# Altium PCB STM32F103ZET6.PCBDOC (part 2 of 4)
Units mil, origin at the board's own origin, x right, y up, seen from the top; angles counter-clockwise.
Board outline 4000 x 2280 mil, 2 copper layers (Top Layer, Bottom Layer); 80 components, 152 nets, 495 pads, 75 vias.
Unrouted connection lines stored in the file: 4.
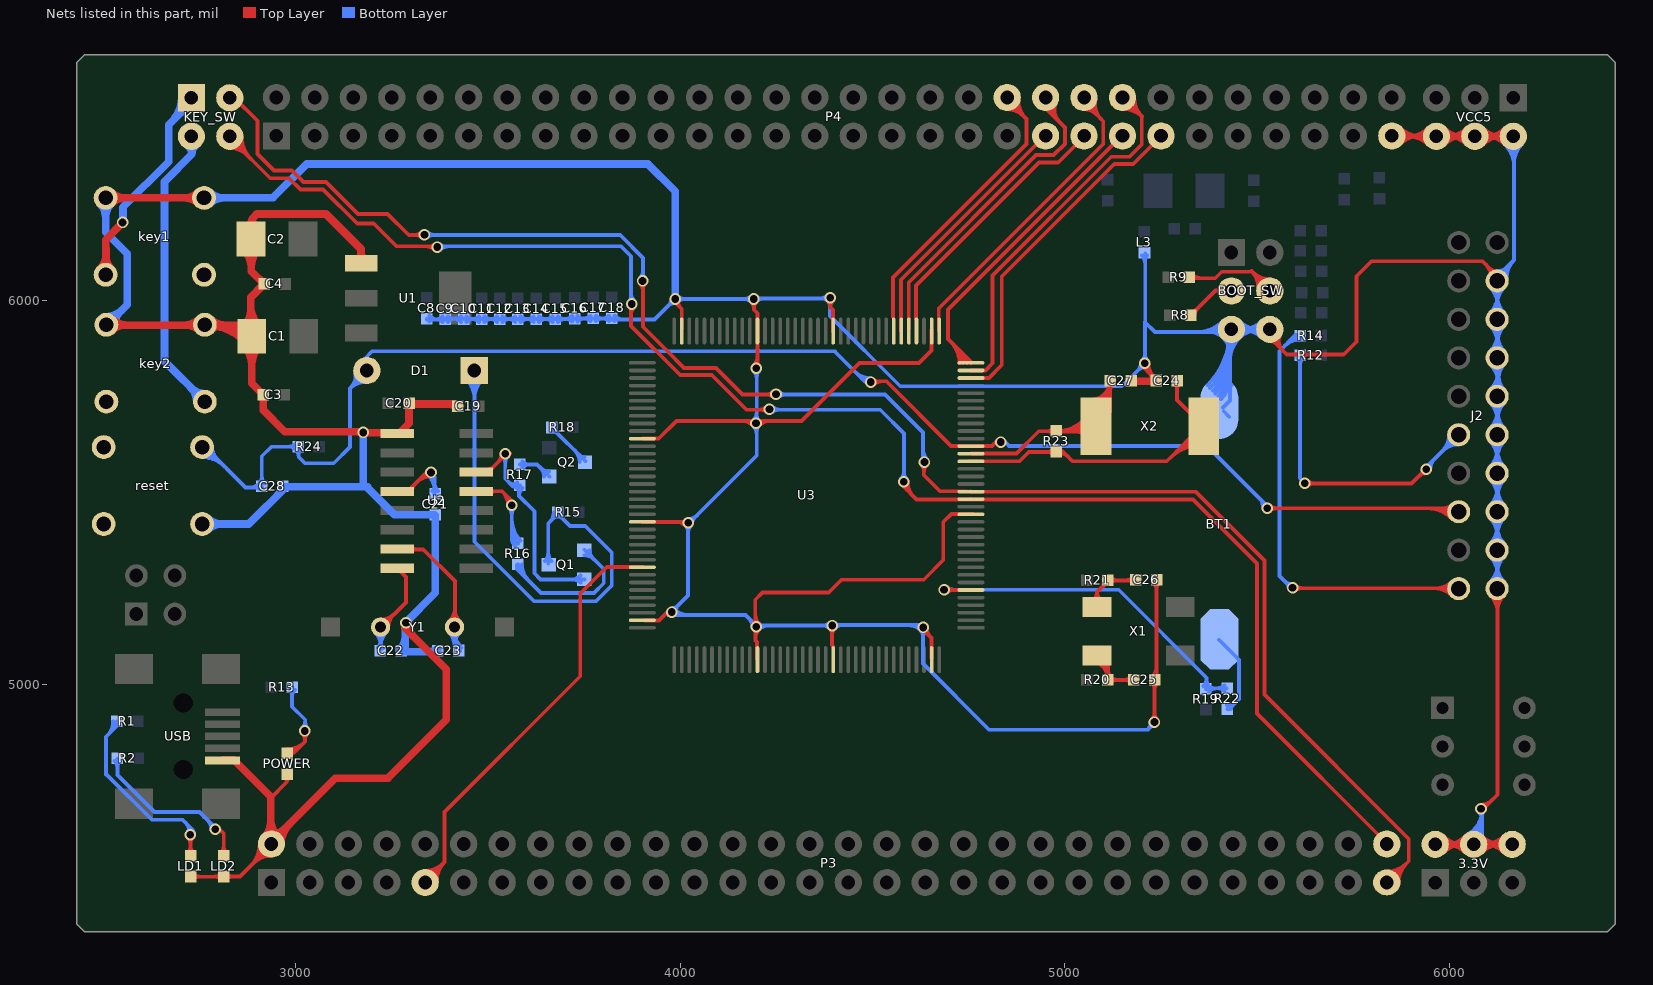
[diagram p2: the nets of this part, all layers, seen from the top]

## Via types
v1: diameter 30, hole 20, Top Layer to Bottom Layer, 68 vias
v2: diameter 125.98, hole 118.11, Top Layer to Bottom Layer, 4 vias
v3: diameter 23.62, hole 15.75, Top Layer to Bottom Layer, 2 vias
v4: diameter 30, hole 15, Top Layer to Bottom Layer, 1 vias

## Nets (pads, with @x,y where several pads share a name; then routed paths per layer and width w, separated by ;. In a path a pad name is that pad's centre, name@x,y a point inside that pad or via, vN(x,y) a via of type N, cw(c..) or ccw(c..) an arc to the next point about the centre after c; other vN are vias at no path point) (continued)
GND: 3.3V.2 3.3V.4 3.3V.6 BOOT_SW.5 BOOT_SW.6 BT1.2 C1.2 C2.2 C3.2 C4.2 C8.2 C9.2 C10.2 C11.2 C12.2 C13.2 C14.2 C15.2 C16.2 C17.2 C18.2 C19.1 C20.1 C21.1 C22.1 C23.1 C24.2 C25.1 C26.2 C27.2 C28.1 J2.4 J2.6 J2.8 J2.10 J2.12 J2.14 J2.16 J2.18 J2.20 key1.1 key2.1 L3.2 LD1.2 LD2.2 P3.2 P4.59 POWER.2 reset.2 U1.1 U2.1 U3.16 U3.38 U3.51 U3.61 U3.71 U3.83 U3.94 U3.107 U3.120 U3.130 U3.143 USB.5 VCC5.2 VCC5.4 VCC5.6 | length 29464.2
  Top Layer w10: LD1.2@2726,4501 LD2.2@2811,4501 ; LD1.2@2734.01,4494.43 cw(c2749.87,4478.56) 2749.87,4501 ; LD1.2@2734.01,4508.57 ccw(c2752.29,4526.85) 2752.29,4501 ; 2787.59,4501 ccw(c2787.59,4526.85) LD2.2@2805.86,4508.57 ; 2790,4501 cw(c2790,4478.56) LD2.2@2805.86,4494.43 ; LD2.2@2810,4496 LD2.2@2813,4499 ; LD2.2@2812.94,4501.5 2855.5,4501.5 P3.2@2940,4586 ; LD2.2@2820.01,4494.43 cw(c2837.08,4477.36) 2837.08,4501.5 cw(c2837.08,4525.64) LD2.2@2820.01,4508.57 ; 2882.93,4528.93 ccw(c2825.85,4586) P3.2@2906.57,4586 ; 2890.17,4536.17 cw(c2937,4489.34) P3.2@2937,4555.57 ; 2900,4546 ccw(c2859.99,4586) P3.2@2916.57,4586 ; 2907.24,4553.24 cw(c2937,4523.48) P3.2@2937,4565.57 ; 2932,4702 2977,4747 ; POWER.2@2971.2,4760.11 cw(c2959.24,4746.98) 2977,4746.98 ; POWER.2@2977,4766 2977,4747 ; POWER.2@2983.51,4759.2 ccw(c2991.72,4746.98) 2977,4746.98 ; U3.94@3900,5423 4022,5423 v1@4023,5422 ; U3.83@3901.56,5640.07 3944.07,5640.07 3990,5686 4314.88,5686 4465.62,5836.75 4620.75,5836.75 4653,5869 U3.38@4653,5923 ; U3.107@3908,5167 3945,5167 3966,5188 v1@3977,5188 ; v1@3989,6003 3989,5992 4004,5977 U3.71@4004,5923 ; 3992.03,5423 cw(c3992.03,5392.03) v1@4013.93,5413.93 ; v1@3996.17,5999.02 ccw(c4010.7,5992.7) 3999.5,5981.5 ; 4001.69,5423 ccw(c4001.69,5440.31) v1@4013.93,5428.07 ; 4158.37,5686 cw(c4158.37,5641.37) v1@4189.93,5672.93 ; 4182.51,5686 cw(c4182.51,5665.51) v1(4197,5680) cw(c4211.49,5665.51) 4211.49,5686 ; v1@4183.93,5995.93 cw(c4164.44,5976.44) 4192,5976.44 ; v1@4190.93,5143.93 cw(c4178.69,5131.69) 4196,5131.69 ; v1@4190.93,5158.07 ccw(c4181.1,5167.9) 4195,5167.9 ; v1@4190.93,5830.07 ccw(c4166.62,5854.38) 4201,5854.38 ; 4192,5981.27 cw(c4212.73,5981.27) v1@4198.07,5995.93 ; v1@4192,6003 4192,5975 4201,5966 U3.61@4201,5923 ; v1@4195,5151 4195,5221 4214,5240 4386.13,5240 4419.13,5273 4633,5273 4684,5324 4684,5423 4705,5444 U3.16@4761,5444 ; 4195,5182.38 ccw(c4229.38,5182.38) v1@4205.07,5158.07 ; 4196,5122.03 cw(c4226.97,5122.03) v1@4205.07,5143.93 ; v1@4196,5151 4196,5115 4200,5111 U3.120@4200,5067.09 ; v1@4199,5824 4201,5826 U3.61@4201,5919 ; 4201,5839.9 ccw(c4214.9,5839.9) v1@4205.07,5830.07 ; v1@4204.07,5672.93 cw(c4235.63,5641.37) 4235.63,5686 ; v1@4383.24,5998.63 cw(c4367.05,5980.98) 4391,5980.98 ; v1@4387.93,5146.93 cw(c4370.86,5129.86) 4395,5129.86 cw(c4419.14,5129.86) v1@4402.07,5146.93 ; 4391,5984.27 cw(c4411.73,5984.27) v1@4397.07,5998.93 ; v1@4391,6006 4391,5981 ; v1@4395,5155 4395,5103.29 4398,5100.29 ; U3.51@4397,5918 4397,5975 4391,5981 ; v1@4634,5150 4634,5141 4653,5122 U3.143@4653,5070 ; v1@4641.94,5147.91 ccw(c4669.86,5144.86) 4650,5125 ; v1@5207,5836 5207,5823 C24.2@5240,5790 ; v1(5208,5836) ccw(c5238.52,5834.68) 5216.92,5813.08 ; v1@5217.99,5835.57 ccw(c5269.35,5833.35) C24.2@5233,5797 ; 5219.41,5810.59 cw(c5199.89,5791.06) C24.2@5227.5,5791.06 ; 5222.88,5807.12 ccw(c5237.5,5821.74) C24.2@5237.5,5801.06 ; v1@5225.93,4910.07 ccw(c5208.86,4927.14) 5233,4927.14 ccw(c5257.14,4927.14) v1@5240.07,4910.07 ; C25.1@5226.93,5005.93 cw(c5212.27,4991.27) 5233,4991.27 ; C25.1@5226.93,5020.07 ccw(c5198.99,5048.01) 5238.5,5048.01 ; C26.2@5231.43,5265.86 cw(c5214.36,5248.79) 5238.5,5248.79 cw(c5262.64,5248.79) C26.2@5245.57,5265.86 ; v1@5233,4901 C25.1@5233,5012 ; 5233,4986.44 cw(c5260.56,4986.44) C25.1@5241.07,5005.93 ; C25.1@5236,5012 5238.5,5014.5 C26.2@5238.5,5272.94 ; BOOT_SW.6@5531,5926 5531,5905 5577,5859 5725,5859 5758,5892 5758,6062 5797,6101 6086,6101 6125,6062 J2.4@6125,6052 ; BOOT_SW.6@5533,5893.57 cw(c5533,5870.79) 5549.1,5886.9 ; BOOT_SW.6@5542.29,5919.25 ccw(c5565.5,5907.37) 5547.07,5888.93 ; BOOT_SW.6@5551.19,5914.69 ccw(c5578.36,5900.8) 5556.78,5879.22 ; BOOT_SW.6@5560.09,5910.14 ccw(c5591.22,5894.22) 5566.5,5869.5 ; P4.59@5851,6426 6164,6426 VCC5.2@6168,6430 ; P4.59@5864.45,6412.55 cw(c5896.92,6380.08) 5896.92,6426 ; P4.59@5864.45,6441.45 ccw(c5901.74,6478.74) 5901.74,6426 ; P4.59@5871.52,6405.48 cw(c5921.06,6355.94) 5921.06,6426 ; P4.59@5871.52,6448.52 ccw(c5925.89,6502.89) 5925.89,6426 ; VCC5.6@5944.48,6404.48 ccw(c5892.53,6352.53) 5892.53,6426 ccw(c5892.53,6499.47) VCC5.6@5944.48,6447.52 ; VCC5.6@5951.55,6411.55 ccw(c5916.67,6376.67) 5916.67,6426 ccw(c5916.67,6475.33) VCC5.6@5951.55,6440.45 ; 3.3V.2@5965,4584 3.3V.4@6065,4584 ; 3.3V.2@5977.45,4570.55 cw(c6009.92,4538.08) 6009.92,4584 ; 3.3V.2@5977.45,4599.45 ccw(c6014.74,4636.74) 6014.74,4584 ; VCC5.6@5980.45,6411.55 cw(c6015.33,6376.67) 6015.33,6426 cw(c6015.33,6475.33) VCC5.6@5980.45,6440.45 ; 3.3V.2@5984.52,4563.48 cw(c6034.06,4513.94) 3.3V.4@6034.06,4584 ; 3.3V.2@5984.52,4606.52 ccw(c6038.89,4660.89) 3.3V.4@6038.89,4584 ; 3.3V.2@5987.11,4584 ccw(c5987.11,4660.89) 3.3V.4@6041.48,4606.52 ; VCC5.6@5987.52,6404.48 cw(c6039.47,6352.53) 6039.47,6426 cw(c6039.47,6499.47) VCC5.6@5987.52,6447.52 ; 3.3V.2@5991.94,4584 cw(c5991.94,4513.94) 3.3V.4@6041.48,4563.48 ; 6011.26,4584 ccw(c6011.26,4636.74) 3.3V.4@6048.55,4599.45 ; 6016.08,4584 cw(c6016.08,4538.08) 3.3V.4@6048.55,4570.55 ; VCC5.4@6044.48,6404.48 ccw(c5992.53,6352.53) 5992.53,6426 ccw(c5992.53,6499.47) VCC5.4@6044.48,6447.52 ; VCC5.4@6051.55,6411.55 ccw(c6016.67,6376.67) 6016.67,6426 ccw(c6016.67,6475.33) VCC5.4@6051.55,6440.45 ; 3.3V.4@6062,4586 3.3V.6@6164,4586 ; 3.3V.4@6077.45,4570.55 cw(c6114.74,4533.26) 6114.74,4586 ; 3.3V.4@6077.45,4599.45 ccw(c6109.92,4631.92) 6109.92,4586 ; VCC5.4@6080.45,6411.55 cw(c6115.33,6376.67) 6115.33,6426 cw(c6115.33,6475.33) VCC5.4@6080.45,6440.45 ; v1@6082,4688 ccw(c6082,4729.04) 6111.02,4700.02 ; 3.3V.4@6084.52,4563.48 cw(c6138.89,4509.11) 3.3V.6@6138.89,4586 ; 3.3V.4@6084.52,4606.52 ccw(c6134.06,4656.06) 3.3V.6@6134.06,4586 ; v1@6085,4674 6125,4714 J2.20@6125,5250 ; 3.3V.4@6087.11,4586 cw(c6087.11,4509.11) 3.3V.6@6141.48,4563.48 ; VCC5.4@6087.52,6404.48 cw(c6139.47,6352.53) 6139.47,6426 cw(c6139.47,6499.47) VCC5.4@6087.52,6447.52 ; 3.3V.4@6091.94,4586 ccw(c6091.94,4656.06) 3.3V.6@6141.48,4606.52 ; 6094.42,6092.58 cw(c6058.42,6056.58) J2.4@6109.08,6051.5 ; 6103.51,6083.49 ccw(c6124,6103.97) J2.4@6124,6075 ; J2.20@6106.32,5232.32 cw(c6061.23,5187.23) 6125,5187.23 ; 6109.33,6077.67 cw(c6085.53,6053.86) J2.4@6119.03,6050.5 ; 6111.26,4586 cw(c6111.26,4533.26) 3.3V.6@6148.55,4570.55 ; J2.20@6113.39,5239.39 cw(c6085.37,5211.37) 6125,5211.37 ; 6116.08,4586 ccw(c6116.08,4631.92) 3.3V.6@6148.55,4599.45 ; 6125,5192.06 cw(c6181.94,5192.06) J2.20@6141.68,5232.32 ; 6125,5216.2 cw(c6157.8,5216.2) J2.20@6134.61,5239.39 ; VCC5.2@6144.48,6404.48 ccw(c6092.53,6352.53) 6092.53,6426 ccw(c6092.53,6499.47) VCC5.2@6144.48,6447.52 ; VCC5.2@6151.55,6411.55 ccw(c6116.67,6376.67) 6116.67,6426 ccw(c6116.67,6475.33) VCC5.2@6151.55,6440.45
  Top Layer w20: key2.1@2505,5935 key2.1@2757,5935 ; key1.1@2509,6266 key1.1@2761.91,6266 ; key1.1@2520.85,6251.15 cw(c2556.7,6215.3) 2556.7,6266 cw(c2556.7,6316.7) key1.1@2520.85,6280.85 ; key2.1@2522.85,5921.15 cw(c2556.28,5887.72) 2556.28,5935 ; key2.1@2522.85,5950.85 ccw(c2561.11,5989.11) 2561.11,5935 ; 2710.79,5935 ccw(c2710.79,5989.11) key2.1@2749.06,5950.85 ; 2715.62,5935 cw(c2715.62,5887.72) key2.1@2749.06,5921.15 ; key1.1@2747.06,6251.15 ccw(c2711.21,6215.3) 2711.21,6266 ccw(c2711.21,6316.7) key1.1@2747.06,6280.85 ; key2.1@2766,5935 2856,5935 C1.2@2885,5906 ; key2.1@2767.7,5935 cw(c2767.7,5795.2) C1.2@2866.55,5894.05 ; key2.1@2778.75,5921.15 cw(c2812.19,5887.72) 2812.19,5935 ; key2.1@2778.75,5950.85 ccw(c2817.02,5989.11) 2817.02,5935 ; USB.5@2811,4805 2839,4805 2935,4709 P3.2@2935,4586 ; 2815.99,5935 cw(c2815.99,5843.49) C1.2@2880.7,5908.2 ; C2.2@2864.55,6132.05 cw(c2815.19,6082.69) 2885,6082.69 ; C1.2@2866.55,5879.05 cw(c2819.61,5832.11) 2886,5832.11 cw(c2952.39,5832.11) C1.2@2905.45,5879.05 ; C1.2@2866.55,5932.95 ccw(c2826.85,5972.65) 2883,5972.65 ; C2.2@2873.55,6191.94 ccw(c2865.31,6212) 2887,6212 ; C1.2@2883,5906 2883,6007 2914,6038 C4.2@2917,6038 ; 2883,5987.13 ccw(c2959.63,5987.13) C1.2@2905.45,5932.95 ; 2885,6087.52 cw(c2947.98,6087.52) C2.2@2903.45,6132.05 ; C2.2@2885,6156 2885,6075 C4.2@2919,6041 ; C1.2@2886,5905 2886,5784 C3.2@2915,5755 ; C2.2@2887,6155 2887,6212 ; C2.2@2899.14,6189.46 cw(c2914,6212) 2887,6212 ; C3.2@2915.5,5754.06 2915.5,5714.5 2972,5658 v1@3173,5658 ; P3.2@2919.02,4603.98 ccw(c2880.43,4642.57) 2935,4642.57 ; P3.2@2935,4589 3103,4757 3240,4757 3392,4909 3392,5040 3285,5147 v1@3285,5163 ; 2935,4652.23 ccw(c3003.23,4652.23) P3.2@2954.98,4603.98 ; P3.2@2937,4611.43 ccw(c2937,4660.76) 2971.88,4625.88 ; P3.2@2962.43,4586 cw(c3035.9,4586) 2983.95,4637.95 ; 3159.1,5658 cw(c3159.1,5639.1) v1@3172.46,5652.46 ; U1.1@3162.74,6103.9 ccw(c3145.2,6121.44) 3170,6121.44 ; U1.1@3170,6095 3170,6133 3079,6224 2899,6224 2887,6212 ; 3170,6126.15 ccw(c3201.47,6126.15) U1.1@3179.22,6103.9 ; v1@3175,5655 3262,5655 U2.1@3263,5654 ; U2.1@3264.64,5653 3268,5653 3295,5680 C20.1@3295,5734 ; v1@3292,5161 ccw(c3342.7,5161) 3306.85,5125.15 ; C20.1@3293,5730 3414,5730 C19.1@3421,5723 ; C20.1@3298.54,5735.54 ccw(c3311.9,5748.9) 3311.9,5730 ; 3394.44,5730 cw(c3394.44,5697.44) C19.1@3417.46,5720.46 ; C27.2@5172,5789 5237,5789 C24.2@5239,5791 ; 5220.45,5789 ccw(c5220.45,5808.12) C24.2@5233.96,5794.6
  Bottom Layer w10: C8.2@3341,5951 3342,5950 3389,5950 3391,5952 3436,5952 3437,5951 3724,5951 3725,5952 3774,5952 3774.5,5952.5 C18.2@3822.06,5952.5 ; C8.2@3348.14,5944.43 cw(c3361.58,5930.98) 3361.58,5950 ; C8.2@3348.14,5958.57 ccw(c3368.83,5979.26) 3368.83,5950 ; 3363.71,5950 ccw(c3363.71,5975.85) C9.2@3381.99,5957.57 ; 3366.13,5950 cw(c3366.13,5927.56) C9.2@3381.99,5943.43 ; C9.2@3396.14,5943.43 cw(c3416.83,5922.74) 3416.83,5952 ; C9.2@3396.14,5957.57 ccw(c3409.58,5971.02) 3409.58,5952 ; 3409.3,5952 cw(c3409.3,5922.74) C10.2@3429.99,5943.43 ; 3416.54,5952 ccw(c3416.54,5971.02) C10.2@3429.99,5957.57 ; C10.2@3444.14,5943.43 cw(c3462.41,5925.15) 3462.41,5951 ; C10.2@3444.14,5957.57 ccw(c3460,5973.44) 3460,5951 ; 3458.71,5951 cw(c3458.71,5925.15) C11.2@3476.99,5943.43 ; 3461.13,5951 ccw(c3461.13,5973.44) C11.2@3476.99,5957.57 ; C11.2@3491.14,5943.43 cw(c3509.41,5925.15) 3509.41,5951 ; C11.2@3491.14,5957.57 ccw(c3507,5973.44) 3507,5951 ; 3505.71,5951 cw(c3505.71,5925.15) C12.2@3523.99,5943.43 ; 3508.13,5951 ccw(c3508.13,5973.44) C12.2@3523.99,5957.57 ; C12.2@3538.14,5943.43 cw(c3556.41,5925.15) 3556.41,5951 ; C12.2@3538.14,5957.57 ccw(c3554,5973.44) 3554,5951 ; 3552.71,5951 cw(c3552.71,5925.15) C13.2@3570.99,5943.43 ; 3555.13,5951 ccw(c3555.13,5973.44) C13.2@3570.99,5957.57 ; C13.2@3585.14,5943.43 cw(c3603.41,5925.15) 3603.41,5951 ; C13.2@3585.14,5957.57 ccw(c3601,5973.44) 3601,5951 ; 3600.71,5951 cw(c3600.71,5925.15) C14.2@3618.99,5943.43 ; 3603.13,5951 ccw(c3603.13,5973.44) C14.2@3618.99,5957.57 ; C14.2@3633.14,5943.43 cw(c3651.41,5925.15) 3651.41,5951 ; C14.2@3633.14,5957.57 ccw(c3649,5973.44) 3649,5951 ; 3649.71,5951 cw(c3649.71,5925.15) C15.2@3667.99,5943.43 ; 3652.13,5951 ccw(c3652.13,5973.44) C15.2@3667.99,5957.57 ; C15.2@3682.14,5943.43 cw(c3700.41,5925.15) 3700.41,5951 ; C15.2@3682.14,5957.57 ccw(c3698,5973.44) 3698,5951 ; 3700.71,5951 ccw(c3700.71,5976.85) C16.2@3718.99,5958.57 ; 3703.13,5951 cw(c3703.13,5928.56) C16.2@3718.99,5944.43 ; C16.2@3733.14,5944.43 cw(c3751.41,5926.15) 3751.41,5952 ; C16.2@3733.14,5958.57 ccw(c3749,5974.44) 3749,5952 ; 3748.71,5952 ccw(c3748.71,5977.85) C17.2@3766.99,5959.57 ; 3751.13,5952 cw(c3751.13,5929.56) C17.2@3766.99,5945.43 ; C17.2@3781.14,5945.43 cw(c3798.21,5928.36) 3798.21,5952.5 cw(c3798.21,5976.64) C17.2@3781.14,5959.57 ; C18.2@3814.99,5945.43 ccw(c3797.92,5928.36) 3797.92,5952.5 ccw(c3797.92,5976.64) C18.2@3814.99,5959.57 ; C18.2@3820,5950 3933,5950 3985,6002 v1@3991,6002 ; C18.2@3829.14,5945.43 cw(c3840.17,5934.39) 3840.17,5950 ; C18.2@3829.14,5959.57 ccw(c3852.24,5982.68) 3852.24,5950 ; 3968.22,5985.22 cw(c3987,5966.44) v1@3987,5993 ; 3970.64,5987.64 ccw(c3955.27,6003) v1@3977,6003 ; v1(3978,5189) ccw(c3997.31,5208.31) 3997.31,5181 ; v1@3978,5199 ccw(c3978,5220.73) 3993.36,5205.36 ; v1@3985.07,5196.07 ccw(c4021.46,5232.46) 4021.46,5181 ; v1@3988,5189 cw(c4014.56,5189) 3995.78,5207.78 ; v1@3991,6003 v1@4194,6003 ; v1@3994.07,5995.93 cw(c4011.14,5978.86) 4011.14,6003 cw(c4011.14,6027.14) v1@3994.07,6010.07 ; v1@4013.93,5413.93 cw(c3999.27,5399.27) 4020,5399.27 ; 4020,5394.44 cw(c4047.56,5394.44) v1@4028.07,5413.93 ; v1@4020,5421 4020,5232 3969,5181 4170,5181 v1@4199,5152 ; v1@4021,5431 ccw(c4021,5462.38) 4043.19,5440.19 ; v1@4028,5425 4199,5596 4199,5795 ; v1@4031,5421 cw(c4047.9,5421) 4035.95,5432.95 ; 4179.51,5171.49 cw(c4159.03,5151) v1@4188,5151 ; v1@4183.93,5995.93 ccw(c4166.86,5978.86) 4166.86,6003 ccw(c4166.86,6027.14) v1@4183.93,6010.07 ; 4184.34,5166.66 ccw(c4198,5180.31) v1@4198,5161 ; v1@4189,6004 4388,6004 v1@4389,6005 ; v1@4189.93,5672.93 cw(c4168.03,5651.03) 4199,5651.03 ; v1@4189.93,5687.07 ccw(c4168.03,5708.97) 4199,5708.97 ; v1@4190.93,5815.93 cw(c4171.44,5796.44) 4199,5796.44 ; v1@4197,5154 4391,5154 v1@4394,5151 ; v1@4198.07,5995.93 cw(c4217.56,5976.44) 4217.56,6004 ; v1@4198.07,6010.07 ccw(c4212.73,6024.73) 4212.73,6004 ; 4199,5660.69 cw(c4216.31,5660.69) v1@4204.07,5672.93 ; 4199,5699.31 ccw(c4216.31,5699.31) v1@4204.07,5687.07 ; 4199,5796 v1@4199,5822 ; 4199,5801.27 cw(c4219.73,5801.27) v1@4205.07,5815.93 ; v1@4205.07,5143.93 cw(c4229.38,5119.62) 4229.38,5154 ; v1@4205.07,5158.07 ccw(c4214.9,5167.9) 4214.9,5154 ; 4361.03,6004 ccw(c4361.03,6034.97) v1@4382.93,6013.07 ; 4370.69,6004 cw(c4370.69,5986.69) 4382.93,5998.93 cw(c4368.27,5984.27) 4389,5984.27 ; v1@4387.93,5146.93 ccw(c4370.86,5129.86) 4370.86,5154 ccw(c4370.86,5178.14) v1@4387.93,5161.07 ; 4389,5979.44 cw(c4416.56,5979.44) v1@4397.07,5998.93 ; v1@4389,6007 4389,5959 4572,5776 5148,5776 v1@5209,5837 ; v1@4395,5155 4629,5155 v1@4633,5151 ; v1@4402.07,5146.93 cw(c4421.56,5127.44) 4421.56,5155 ; v1@4402.07,5161.07 ccw(c4416.73,5175.73) 4416.73,5155 ; 4593.37,5155 cw(c4593.37,5110.37) 4624.93,5141.93 cw(c4610.27,5127.27) 4631,5127.27 ; 4617.51,5155 cw(c4617.51,5134.51) v1(4632,5149) ; 4631,5122.44 cw(c4658.56,5122.44) v1@4639.07,5141.93 ; v1@4631,5150 4631,5055 4803,4883 5215,4883 v1@5233,4901 ; v1@5198,5836 cw(c5173.86,5836) 5190.93,5818.93 cw(c5208,5801.86) v1@5208,5826 ; L3.2@5199.99,6116.43 cw(c5178.25,6094.68) 5209,6094.68 ; v1@5200.93,5843.07 ccw(c5183.86,5860.14) 5208,5860.14 ccw(c5232.14,5860.14) v1@5215.07,5843.07 ; 5208,5943 5208,5839 v1@5210,5837 ; 5209,6104.03 cw(c5226.53,6104.03) L3.2@5214.14,6116.43 ; L3.2@5209,6121 5209,5942 5234,5917 BOOT_SW.5@5432,5917 ; 5216,4884 ccw(c5198.97,4901.04) v1@5223.02,4902.42 ; 5219.34,4887.34 cw(c5233,4873.69) v1@5233,4893 ; 5342.63,5917 ccw(c5342.63,6014.37) BOOT_SW.5@5411.48,5945.52 ; 5366.77,5917 ccw(c5366.77,5990.23) BOOT_SW.5@5418.55,5938.45 ; BT1.2@5370.66,5778.59 ccw(c5229.81,5919.44) BOOT_SW.5@5429,5919.44 ; 5376.43,5917 cw(c5376.43,5867.43) 5411.48,5902.48 cw(c5369.19,5860.19) 5429,5860.19 ; BT1.2@5377.73,5771.52 ccw(c5253.95,5895.3) BOOT_SW.5@5429,5895.3 ; BT1.2@5384.8,5764.45 ccw(c5278.09,5871.16) 5429,5871.16 ; 5390.91,5917 ccw(c5390.91,5966.09) BOOT_SW.5@5425.62,5931.38 ; BT1.2@5391.87,5757.38 ccw(c5302.24,5847.02) 5429,5847.02 ; BT1.2@5398.94,5750.31 ccw(c5326.38,5822.87) 5429,5822.87 ; BT1.2@5406.01,5743.24 ccw(c5350.52,5798.73) 5429,5798.73 ; BT1.2@5411,5721 5429,5739 BOOT_SW.5@5429,5921 ; BT1.2@5413,5711 BT1.2@5427,5697 ; BOOT_SW.5@5418.55,5909.55 cw(c5393.33,5884.33) 5429,5884.33 ; 5429,5788.7 ccw(c5443.29,5788.7) BT1.2@5433.18,5778.59 ; 5429,5840.87 cw(c5516.13,5840.87) 5454.52,5902.48 cw(c5501.64,5855.36) BOOT_SW.6@5501.64,5922 ; 5429,5865.01 cw(c5491.99,5865.01) 5447.45,5909.55 cw(c5477.5,5879.5) 5477.5,5922 ; BOOT_SW.5@5434,5923 5435,5922 BOOT_SW.6@5532,5922 ; BOOT_SW.5@5447.45,5938.45 ccw(c5487.16,5978.16) 5487.16,5922 ; BOOT_SW.5@5454.52,5945.52 ccw(c5511.3,6002.3) BOOT_SW.6@5511.3,5922 ; BOOT_SW.5@5454.7,5922 ccw(c5454.7,6002.3) BOOT_SW.6@5511.48,5945.52 ; BOOT_SW.5@5464.36,5922 cw(c5464.36,5855.36) BOOT_SW.6@5511.48,5902.48 ; 5478.84,5922 ccw(c5478.84,5978.16) BOOT_SW.6@5518.55,5938.45 ; 5488.5,5922 cw(c5488.5,5879.5) BOOT_SW.6@5518.55,5909.55 ; 3.3V.4@6048.25,4611.62 ccw(c6013.69,4674) 6085,4674 6085,4607 3.3V.4@6062,4584 ; 3.3V.4@6053.1,4602.87 ccw(c6023.09,4657.02) 6085,4657.02 ; 3.3V.4@6057.94,4594.13 ccw(c6032.5,4640.05) 6085,4640.05 ; 3.3V.4@6062.79,4585.38 ccw(c6041.9,4623.08) 6085,4623.08 ; v1@6074.93,4670.93 cw(c6050.62,4646.62) 6085,4646.62 ; 6085,4661.1 cw(c6098.9,4661.1) v1@6089.07,4670.93 ; J2.20@6106.32,5267.68 ccw(c6061.23,5312.77) 6125,5312.77 ; J2.18@6106.32,5332.32 cw(c6061.23,5287.23) 6125,5287.23 ; J2.18@6106.32,5367.68 ccw(c6063.64,5410.36) 6124,5410.36 ccw(c6184.36,5410.36) J2.18@6141.68,5367.68 ; J2.16@6106.32,5432.32 cw(c6063.64,5389.64) 6124,5389.64 cw(c6184.36,5389.64) J2.16@6141.68,5432.32 ; J2.16@6106.32,5467.68 ccw(c6058.82,5515.18) 6126,5515.18 ; J2.14@6106.32,5532.32 cw(c6058.82,5484.82) 6126,5484.82 ; J2.14@6106.32,5567.68 ccw(c6063.64,5610.36) 6124,5610.36 ccw(c6184.36,5610.36) J2.14@6141.68,5567.68 ; J2.12@6106.32,5632.32 cw(c6063.64,5589.64) 6124,5589.64 cw(c6184.36,5589.64) J2.12@6141.68,5632.32 ; J2.12@6106.32,5667.68 ccw(c6058.82,5715.18) 6126,5715.18 ; J2.10@6106.32,5732.32 cw(c6058.82,5684.82) 6126,5684.82 ; J2.10@6106.32,5767.68 ccw(c6053.99,5820.01) 6128,5820.01 ; J2.8@6106.32,5832.32 cw(c6053.99,5779.99) 6128,5779.99 ; J2.8@6106.32,5867.68 ccw(c6058.82,5915.18) 6126,5915.18 ; J2.6@6106.32,5932.32 cw(c6058.82,5884.82) 6126,5884.82 ; J2.6@6106.32,5967.68 ccw(c6061.23,6012.77) 6125,6012.77 ; J2.4@6106.32,6032.32 cw(c6061.23,5987.23) 6125,5987.23 ; J2.20@6113.39,5260.61 ccw(c6085.37,5288.63) 6125,5288.63 ; J2.18@6113.39,5339.39 cw(c6085.37,5311.37) 6125,5311.37 ; J2.18@6113.39,5360.61 ccw(c6087.79,5386.21) 6124,5386.21 ccw(c6160.21,5386.21) J2.18@6134.61,5360.61 ; J2.16@6113.39,5439.39 cw(c6087.79,5413.79) 6124,5413.79 cw(c6160.21,5413.79) J2.16@6134.61,5439.39 ; J2.16@6113.39,5460.61 ccw(c6082.96,5491.04) 6126,5491.04 ; J2.14@6113.39,5539.39 cw(c6082.96,5508.96) 6126,5508.96 ; J2.14@6113.39,5560.61 ccw(c6087.79,5586.21) 6124,5586.21 ccw(c6160.21,5586.21) J2.14@6134.61,5560.61 ; J2.12@6113.39,5639.39 cw(c6087.79,5613.79) 6124,5613.79 cw(c6160.21,5613.79) J2.12@6134.61,5639.39 ; J2.12@6113.39,5660.61 ccw(c6082.96,5691.04) 6126,5691.04 ; J2.10@6113.39,5739.39 cw(c6082.96,5708.96) 6126,5708.96 ; J2.10@6113.39,5760.61 ccw(c6078.13,5795.87) 6128,5795.87 ; J2.8@6113.39,5839.39 cw(c6078.13,5804.13) 6128,5804.13 ; J2.8@6113.39,5860.61 ccw(c6082.96,5891.04) 6126,5891.04 ; J2.6@6113.39,5939.39 cw(c6082.96,5908.96) 6126,5908.96 ; J2.6@6113.39,5960.61 ccw(c6085.37,5988.63) 6125,5988.63 ; J2.4@6113.39,6039.39 cw(c6085.37,6011.37) 6125,6011.37 ; J2.4@6123,6044 6123,6059 6168,6104 ; J2.10@6124,5739 J2.10@6124,5750 ; J2.4@6124,6075 ccw(c6124,6111.21) 6149.61,6085.61 ; 6125,5283.8 ccw(c6157.8,5283.8) J2.20@6134.61,5260.61 ; 6125,5292.06 cw(c6181.94,5292.06) J2.18@6141.68,5332.32 ; 6125,5307.94 ccw(c6181.94,5307.94) J2.20@6141.68,5267.68 ; 6125,5316.2 cw(c6157.8,5316.2) J2.18@6134.61,5339.39 ; 6125,5983.8 ccw(c6157.8,5983.8) J2.6@6134.61,5960.61 ; 6125,5992.06 cw(c6181.94,5992.06) J2.4@6141.68,6032.32 ; 6125,6007.94 ccw(c6181.94,6007.94) J2.6@6141.68,5967.68 ; 6125,6016.2 cw(c6157.8,6016.2) J2.4@6134.61,6039.39 ; J2.4@6125,6048 6125,5949 6126,5948 6126,5851 6128,5849 6128,5752 6126,5750 6126,5651 6124,5649 6124,5553 6126,5551 6126,5452 J2.16@6124,5450 6124,5351 6125,5350 6125,5249 J2.20@6128,5246 ; 6126,5481.38 ccw(c6155.38,5481.38) J2.16@6134.61,5460.61 ; 6126,5494.47 cw(c6179.53,5494.47) J2.14@6141.68,5532.32 ; 6126,5505.53 ccw(c6179.53,5505.53) J2.16@6141.68,5467.68 ; 6126,5518.62 cw(c6155.38,5518.62) J2.14@6134.61,5539.39 ; 6126,5681.38 ccw(c6155.38,5681.38) J2.12@6134.61,5660.61 ; 6126,5694.47 cw(c6179.53,5694.47) J2.10@6141.68,5732.32 ; 6126,5705.53 ccw(c6179.53,5705.53) J2.12@6141.68,5667.68 ; 6126,5718.62 cw(c6155.38,5718.62) J2.10@6134.61,5739.39 ; 6126,5881.38 ccw(c6155.38,5881.38) J2.8@6134.61,5860.61 ; 6126,5894.47 cw(c6179.53,5894.47) J2.6@6141.68,5932.32 ; 6126,5905.53 ccw(c6179.53,5905.53) J2.8@6141.68,5867.68 ; 6126,5918.62 cw(c6155.38,5918.62) J2.6@6134.61,5939.39 ; 6128,5799.3 cw(c6174.7,5799.3) J2.8@6141.68,5832.32 ; 6128,5800.7 ccw(c6174.7,5800.7) J2.10@6141.68,5767.68 ; J2.4@6138.95,6051.22 cw(c6186.35,6055.1) 6152.72,6088.72 ; VCC5.2@6144.48,6404.48 cw(c6087.7,6347.7) 6168,6347.7 ; J2.4@6148.92,6052.04 cw(c6214.59,6057.4) 6168,6104 ; VCC5.2@6151.55,6411.55 cw(c6111.84,6371.84) 6168,6371.84 ; 6168,6357.36 cw(c6234.64,6357.36) VCC5.2@6187.52,6404.48 ; 6168,6381.5 cw(c6210.5,6381.5) VCC5.2@6180.45,6411.55 ; VCC5.2@6168,6426 6168,6104
  Bottom Layer w20: key1.1@2491.15,6251.15 cw(c2455.3,6215.3) 2506,6215.3 cw(c2556.7,6215.3) key1.1@2520.85,6251.15 ; key2.1@2506,5932 2562,5988 2562,6121 2506,6177 key1.1@2506,6265 ; key2.1@2508,5957 ccw(c2508,6012.53) 2547.26,5973.26 ; key2.1@2529,5936 cw(c2574.87,5936) 2542.44,5968.44 ; reset.2@2756.91,5418 2878,5418 C28.1@2974,5514 ; key2.1@2757,5935 key2.1@2760,5938 ; key1.1@2765,6266 2941,6266 3029,6354 3916,6354 3987,6283 v1(3987,6003) ; reset.2@2771.75,5403.15 cw(c2807.6,5367.3) 2807.6,5418 cw(c2807.6,5468.7) reset.2@2771.75,5432.85 ; key1.1@2776.75,6251.15 cw(c2812.6,6215.3) 2812.6,6266 cw(c2812.6,6316.7) key1.1@2776.75,6280.85 ; 2952.1,5492.1 ccw(c2928.2,5516) C28.1@2962,5516 ; C28.1@2972,5515 3187,5515 ; 3176,5517 v1(3176,5656) ; 3187,5512 3257,5442 C21.1@3362,5442 ; C22.1@3271.46,5092.54 ccw(c3238.79,5125.21) 3285,5125.21 ; C22.1@3273,5085 3285,5097 v1@3285,5161 ; C22.1@3275,5086 3365,5086 C23.1@3369,5090 ; C22.1@3278.54,5092.54 ccw(c3294.31,5108.31) 3294.31,5086 ; 3285,5144.1 cw(c3303.9,5144.1) v1@3290.54,5157.46 ; v1@3286,5162 3363,5239 C21.1@3363,5440 ; v1@3292,5161 cw(c3308.9,5161) 3296.95,5172.95 ; 3350.69,5086 ccw(c3350.69,5108.31) C23.1@3366.46,5092.54
  other v1: 6082,4678 5233,4903 4198,5151 4395,5154 3287,5161 4021,5421 4198,5823 4191,6003 4390,6006
KEY0: KEY_SW.2 P3.59 U3.19 | length 4904.3
  Top Layer w10: KEY_SW.2@2829,6526 2841,6526 2900.57,6466.43 2900.57,6380.43 2944,6337 ; 2945,6337 2990.13,6337 3020.13,6307 3079.13,6307 3162.13,6224 3239,6224 3294,6169 v1@3335,6169 ; 3308.44,6169 ccw(c3308.44,6196.56) v1@3327.93,6177.07 ; 3313.27,6169 cw(c3313.27,6148.27) v1@3327.93,6162.93 ; v1@3894.93,6042.93 cw(c3875.44,6023.44) 3903,6023.44 ; 3903,6028.27 cw(c3923.73,6028.27) v1@3909.07,6042.93 ; v1@3903,6052 3903,5931 3964.88,5869.12 3964.88,5868.99 4009.87,5824 4093,5824 4162,5755 v1@4251,5755 ; v1@4241.93,5747.93 ccw(c4224.86,5730.86) 4224.86,5755 ccw(c4224.86,5779.14) v1@4241.93,5762.07 ; v1@4627.93,5571.93 cw(c4615.69,5559.69) 4633,5559.69 ; 4633,5550.03 cw(c4663.97,5550.03) v1@4642.07,5571.93 ; v1@4633,5578 4633,5545 4675,5503 U3.19@4745,5503 ; U3.19@4755,5503 4755.97,5502.03 5339.97,5502.03 5518.84,5323.16 5518.84,4974.35 5894,4599.19 5894,4541 P3.59@5836,4483 ; P3.59@5838.97,4504.46 ccw(c5838.97,4549.12) 5870.54,4517.54 ; P3.59@5838.97,4514.46 ccw(c5838.97,4583.26) 5887.61,4534.61 ; P3.59@5857.43,4486 cw(c5901.93,4486) 5870.47,4517.47 ; P3.59@5867.43,4486 cw(c5936.08,4486) 5887.54,4534.54
  Bottom Layer w10: KEY_SW.2@2825,6525 KEY_SW.2@2838,6525 ; v1@3335,6169 3844,6169 3903,6110 v1@3903,6055 ; v1@3342.07,6162.93 cw(c3356.73,6148.27) 3356.73,6169 ; v1@3342.07,6177.07 ccw(c3361.56,6196.56) 3361.56,6169 ; v1@3894.93,6057.07 ccw(c3875.44,6076.56) 3903,6076.56 ; 3903,6071.73 ccw(c3923.73,6071.73) v1@3909.07,6057.07 ; v1@4251,5755 4532,5755 4631,5656 v1@4631,5580 ; v1@4256.07,5747.93 cw(c4273.14,5730.86) 4273.14,5755 cw(c4273.14,5779.14) v1@4256.07,5762.07 ; v1@4627.93,5586.07 ccw(c4620.51,5593.49) 4631,5593.49 ; 4631,5612.8 ccw(c4668.8,5612.8) v1@4642.07,5586.07
  other v1: 4635,5579 4249,5755 3902,6050 3335,6170
KEY1: KEY_SW.4 P3.60 U3.18 | length 4719.8
  Top Layer w10: KEY_SW.4@2829,6395.57 cw(c2829,6331.75) 2874.12,6376.88 ; KEY_SW.4@2829,6405.57 cw(c2829,6365.89) 2857.05,6393.95 ; KEY_SW.4@2829,6424 2829,6422 2934,6317 2983.26,6317 3012.26,6288 3071.26,6288 3160.26,6199 3203,6199 3262,6140 v1@3370,6140 ; KEY_SW.4@2849.43,6426 ccw(c2908.42,6426) 2866.71,6384.29 ; KEY_SW.4@2859.43,6426 ccw(c2942.56,6426) 2883.78,6367.22 ; 3339.03,6140 cw(c3339.03,6109.03) v1@3360.93,6130.93 ; 3348.69,6140 ccw(c3348.69,6157.31) v1@3360.93,6145.07 ; v1@3866.93,5982.93 cw(c3854.69,5970.69) 3872,5970.69 ; 3872,5961.03 cw(c3902.97,5961.03) v1@3881.07,5982.93 ; v1@3872,5991 3872,5933 4000,5805 4082,5805 4172,5715 v1@4231,5715 ; 4205.44,5715 ccw(c4205.44,5742.56) v1@4224.93,5723.07 ; 4210.27,5715 cw(c4210.27,5694.27) v1@4224.93,5708.93 ; 4590.19,5505.81 cw(c4612.38,5528) v1(4581,5528) 4581,5515 4614,5482 U3.18@4757,5482 ; v1@4591,5528 ccw(c4646.53,5528) 4607.26,5488.74 ; U3.18@4755,5483 4755.97,5482.03 5332.97,5482.03 5499.84,5315.16 5499.84,4925.16 P3.60@5841,4584
  Bottom Layer w10: v1@3369,6140 3846.13,6140 3872,6114.13 v1@3872,5991 ; v1@3375.07,6130.93 cw(c3396.97,6109.03) 3396.97,6140 ; v1@3375.07,6145.07 ccw(c3387.31,6157.31) 3387.31,6140 ; v1@3866.93,5997.07 ccw(c3854.69,6009.31) 3872,6009.31 ; 3872,6018.97 ccw(c3902.97,6018.97) v1@3881.07,5997.07 ; v1@4231,5715 4520,5715 4582,5653 v1@4582,5530 ; v1@4239.07,5708.93 cw(c4253.73,5694.27) 4253.73,5715 ; v1@4239.07,5723.07 ccw(c4258.56,5742.56) 4258.56,5715 ; v1@4573.93,5535.07 ccw(c4554.44,5554.56) 4582,5554.56 ; 4582,5549.73 ccw(c4602.73,5549.73) v1@4588.07,5535.07
  other v1: 4232,5716 3874,5990 3368,6138
NetBOOT1_3: BOOT_SW.3 R8.2 | length 202.1
  Top Layer w10: R8.2@5327.5,5970.94 ccw(c5327.5,5996.13) 5345.32,5978.32 ; R8.2@5328,5961 5392,6025 ; R8.2@5337.5,5960.94 cw(c5360.59,5960.94) 5344.26,5977.26 ; BOOT_SW.3@5403.61,6016.1 ccw(c5392,6012.98) 5392,6025 ; BOOT_SW.3@5404.17,6033.73 cw(c5392,6037.84) 5392,6025 ; BOOT_SW.3@5434,6025 5392,6025
NetBOOT1_4: BOOT_SW.4 R9.1 | length 449
  Top Layer w10: R9.1@5326,6057 5391,6057 5408,6074 5487,6074 BOOT_SW.4@5536,6025 ; R9.1@5330.07,6052.93 cw(c5339.9,6043.1) 5339.9,6057 ; R9.1@5330.07,6067.07 ccw(c5354.38,6091.38) 5354.38,6057 ; 5485,6076 cw(c5441.62,6032.62) BOOT_SW.4@5502.7,6026.86 ; 5487.88,6073.12 ccw(c5533,6118.25) BOOT_SW.4@5533,6054.43 ; 5500.03,6060.97 cw(c5469.09,6030.03) BOOT_SW.4@5512.66,6025.92 ; 5504.95,6056.05 ccw(c5533,6084.11) BOOT_SW.4@5533,6044.43
NetBT1_1: BT1.1 R22.1 | length 254.2
  Bottom Layer w10: BT1.1@5401,5117 5453,5065 5453,4963 5427,4937 R22.1@5423,4937 ; R22.1@5422,4947 ccw(c5422,4983.21) 5447.61,4957.61 ; R22.1@5432,4937 cw(c5444.07,4937) R22.1@5435.54,4945.54
NetC21_2: C21.2 U2.4 | length 352.7
  Top Layer w10: U2.4@3272,5505 3293,5505 3341,5553 v1@3351,5553 ; U2.4@3302.95,5503 cw(c3331.78,5503) 3311.39,5523.39 ; 3314.44,5526.44 cw(c3352,5488.89) v1@3352,5542 ; 3331.51,5543.51 cw(c3352,5523.03) v1(3352,5552)
  Bottom Layer w10: v1@3344.93,5544.93 cw(c3306.13,5506.13) C21.2@3361,5506.13 ; v1@3350,5552 3361,5541 C21.2@3361,5495 ; v1(3352,5552) cw(c3330.27,5530.27) 3361,5530.27 ; C21.2@3355.86,5503.57 ccw(c3343.47,5515.97) 3361,5515.97 ; 3361,5525.32 ccw(c3391.75,5525.32) C21.2@3370.01,5503.57
NetC22_2: C22.2 U2.8 Y1.1 | length 460.2
  Top Layer w10: Y1.1@3220,5147 3287,5214 3287,5280 3271,5296 U2.8@3271,5302 ; Y1.1@3221,5160 ccw(c3221,5188.97) 3241.49,5168.49 ; Y1.1@3221,5170 ccw(c3221,5223.11) 3258.56,5185.56 ; Y1.1@3241,5150 cw(c3284.46,5150) 3253.73,5180.73
  Bottom Layer w10: Y1.1@3206.86,5135.86 cw(c3172.72,5101.72) 3221,5101.72 cw(c3269.28,5101.72) Y1.1@3235.14,5135.86 ; C22.2@3213.43,5096.01 ccw(c3195.15,5114.29) 3221,5114.29 ; 3221,5111.87 ccw(c3243.43,5111.87) C22.2@3227.57,5096.01 ; Y1.1@3221,5150 3221,5093 C22.2@3222,5092
NetC23_2: C23.2 U2.7 Y1.2 | length 663.8
  Top Layer w10: U2.7@3253,5355 3256,5352 3332,5352 3414,5270 Y1.2@3414,5148 ; U2.7@3300.95,5348.18 cw(c3310.16,5338.97) 3310.16,5352 ; U2.7@3300.95,5357.82 ccw(c3314.99,5371.86) 3314.99,5352 ; Y1.2@3398.98,5164.14 ccw(c3362.73,5200.39) 3414,5200.39 ; Y1.2@3406.05,5157.07 ccw(c3386.87,5176.25) 3414,5176.25 ; 3414,5196.17 ccw(c3459.3,5196.17) Y1.2@3427.27,5164.14
  Bottom Layer w10: Y1.2@3398.98,5135.86 cw(c3365.15,5102.02) 3413,5102.02 cw(c3460.3,5102) Y1.2@3427.14,5135.74 ; 3413,5116.83 ccw(c3452.26,5116.83) C23.2@3424.5,5089.06 ; Y1.2@3413,5140.97 ccw(c3476.41,5140.97) C23.2@3431.57,5096.14 ; Y1.2@3413,5149 3413,5102 C23.2@3427,5088
NetC24_1: C24.1 R23.2 U3.23 X2.1 | length 1267.8
  Top Layer w10: U3.23@4751,5581 4882,5581 4906,5605 4996,5605 ; 4952.59,5605 ccw(c4952.59,5630.85) R23.2@4970.86,5612.57 ; 4955,5605 cw(c4955,5582.56) R23.2@4970.86,5598.43 ; R23.2@4984.03,5597.57 cw(c4993.63,5585.07) 5004.78,5596.22 ; R23.2@4986.18,5599.83 cw(c4996,5593.08) 4996,5605 ; R23.2@4986.63,5610.45 ccw(c4996,5615.79) 4996,5605 ; 4996.72,5604.28 ccw(c4986.63,5594.18) R23.2@4977.94,5605.5 cw(c4977.94,5563.1) 5007.92,5593.08 ; 5275.34,5591.34 cw(c5350.46,5516.22) X2.1@5359.7,5622.06 ; C24.1@5284.93,5783.93 cw(c5267.86,5766.86) 5292,5766.86 cw(c5316.14,5766.86) C24.1@5299.07,5783.93 ; 5290.51,5606.51 cw(c5352.9,5544.13) X2.1@5360.57,5632.02 ; C24.1@5292,5793 5292,5740 X2.1@5360,5672 ; 5305.68,5621.68 cw(c5355.33,5572.03) X2.1@5361.43,5641.98 ; 5320.85,5636.85 cw(c5357.77,5599.93) X2.1@5362.3,5651.94 ; X2.1@5359,5675 5265,5581 5020,5581 4996,5605
NetC25_2: C25.2 R20.1 X1.1 | length 401.3
  Top Layer w10: X1.1@5083,5075 5093,5075 5113,5055 R20.1@5113,5013 ; X1.1@5085.37,5058.11 cw(c5058.39,5010.63) R20.1@5113,5010.63 ; X1.1@5090.31,5066.8 cw(c5068.16,5027.81) R20.1@5113,5027.81 ; X1.1@5095.25,5075.49 cw(c5077.92,5045) 5113,5045 ; R20.1@5104.93,5020.07 ccw(c5085.44,5039.56) 5113,5039.56 ; R20.1@5113,5012 5177,5012 C25.2@5178,5013 ; 5113,5034.73 ccw(c5133.73,5034.73) 5119.07,5020.07 ccw(c5138.56,5039.56) 5138.56,5012 ; R20.1@5119.07,5005.93 cw(c5133.73,4991.27) 5133.73,5012 ; 5152.79,5012 ccw(c5152.79,5039.77) C25.2@5172.43,5020.14 ; 5157.93,5012 cw(c5157.93,4991.49) C25.2@5172.43,5005.99
NetC26_1: C26.1 R21.1 X1.4 | length 321
  Top Layer w10: X1.4@5072.3,5219.12 ccw(c5057.69,5241) 5084,5241 ; X1.4@5084,5202 5084,5241 ; 5092.81,5249.81 ccw(c5070.62,5272) R21.1@5102,5272 ; X1.4@5095.53,5218.87 cw(c5111,5241) 5084,5241 ; R21.1@5100.05,5257.05 cw(c5112,5245.1) R21.1@5112,5262 ; R21.1@5119.07,5264.93 cw(c5133.73,5250.27) 5133.73,5271 ; R21.1@5119.07,5279.07 ccw(c5138.56,5298.56) 5138.56,5271 ; 5155.03,5271 ccw(c5155.03,5301.97) C26.1@5176.93,5280.07 ; 5164.69,5271 cw(c5164.69,5253.69) C26.1@5176.93,5265.93 ; C26.1@5186,5273 5184,5271 5112,5271 5112,5269 5084,5241
NetC27_1: C27.1 R23.1 U3.24 X2.2 | length 1295.2
  Top Layer w10: U3.24@4757,5601 4874,5601 4932,5659 R23.1@4981,5659 ; 4951.44,5659 ccw(c4951.44,5686.56) R23.1@4970.93,5667.07 ; 4956.27,5659 cw(c4956.27,5638.27) R23.1@4970.93,5652.93 ; R23.1@4985.07,5652.93 cw(c4997.31,5640.69) 4997.31,5658 ; R23.1@4985.07,5667.07 ccw(c5006.97,5688.97) 5006.97,5658 ; 4996.64,5658 ccw(c4996.64,5743.75) X2.2@5061.96,5688.2 ; 5018.27,5658 ccw(c5018.27,5725.35) X2.2@5069.57,5681.72 ; 5030.3,5658 cw(c5030.3,5621.3) X2.2@5056.25,5647.25 ; 5039.9,5658 ccw(c5039.9,5706.95) X2.2@5077.19,5675.24 ; X2.2@5054.34,5694.67 cw(c4975.01,5762.14) 4975.01,5658 5065,5658 X2.2@5081,5674 ; X2.2@5075.24,5741.52 ccw(c5066.83,5792) 5118,5792 5118,5709 X2.2@5080,5671 ; X2.2@5076.89,5731.66 ccw(c5068.8,5780.19) C27.1@5118,5780.19 ; X2.2@5078.53,5721.8 ccw(c5070.77,5768.39) 5118,5768.39 ; X2.2@5080.18,5711.93 ccw(c5072.73,5756.58) 5118,5756.58 ; X2.2@5081.82,5702.07 ccw(c5074.7,5744.78) X2.2@5118,5744.78 ; X2.2@5083.47,5692.2 ccw(c5076.67,5732.97) X2.2@5118,5732.97 ; C27.1@5110.93,5782.93 cw(c5093.86,5765.86) 5118,5765.86 cw(c5142.14,5765.86) C27.1@5125.07,5782.93
NetD1_2: D1.2 Q1.3 R15.1 | length 1621.6
  Bottom Layer w10: D1.2@3443.24,5795.48 cw(c3390.72,5742.96) 3465,5742.96 ; D1.2@3450.32,5802.55 cw(c3414.86,5767.1) 3465,5767.1 ; 3465,5744.1 cw(c3537.67,5744.1) D1.2@3486.28,5795.48 ; 3465,5768.24 cw(c3513.52,5768.24) D1.2@3479.21,5802.55 ; D1.2@3465,5821 3465,5372 3620,5217 3781,5217 3822,5258 3822,5344 3753,5413 3713,5413 R15.1@3679,5447 ; Q1.3@3647.76,5321.19 ccw(c3625.47,5343.49) 3657,5343.49 ; Q1.3@3657,5315 3657,5419 3683,5445 R15.1@3683,5450 ; 3657,5342.31 ccw(c3686.87,5342.31) Q1.3@3665.75,5321.19 ; 3660.39,5422.39 ccw(c3634.79,5448) R15.1@3671,5448 ; R15.1@3672.46,5434.46 cw(c3681,5425.93) 3681,5438 cw(c3681,5421.1) R15.1@3692.95,5433.05 ; R15.1@3691,5448 ccw(c3722.38,5448) 3700.19,5425.81
NetJ2_11: J2.11 R12.1 | length 1080.1
  Top Layer w10: v1@5625,5523 5901,5523 v1@5940,5562 ; v1@5631.07,5516.93 cw(c5645.73,5502.27) 5645.73,5523 ; v1@5631.07,5531.07 ccw(c5650.56,5550.56) 5650.56,5523 ; 5919.51,5541.51 cw(c5940,5521.03) v1@5940,5550 ; 5924.34,5546.34 ccw(c5910.69,5560) v1@5930,5560
  Bottom Layer w10: R12.1@5604.93,5849.93 cw(c5590.27,5835.27) 5611,5835.27 ; 5611,5542 5611,5537 v1@5625,5523 ; 5611,5543 R12.1@5611,5854 ; 5611,5830.44 cw(c5638.56,5830.44) R12.1@5619.07,5849.93 ; v1@5940,5566 J2.11@6023,5649 ; v1@5950,5560 cw(c5988.63,5560) 5961.31,5587.31 ; J2.11@5999,5650 cw(c5938.64,5650) 5981.32,5607.32 cw(c6024,5564.64) J2.11@6024,5625 ; J2.11@6009,5650 cw(c5972.79,5650) 5998.39,5624.39 cw(c6024,5598.79) J2.11@6024,5635
  other v1: 5624,5524 5940,5560
NetJ2_19: J2.19 R14.1 | length 1435.6
  Top Layer w10: v1@5590,5252 5591,5251 J2.19@6027,5251 ; v1@5599.07,5244.93 cw(c5613.73,5230.27) 5613.73,5251 ; v1@5599.07,5259.07 ccw(c5618.56,5278.56) 5618.56,5251 ; 5961.23,5251 cw(c5961.23,5187.23) J2.19@6006.32,5232.32 ; 5966.06,5251 ccw(c5966.06,5307.94) J2.19@6006.32,5267.68 ; 5985.37,5251 cw(c5985.37,5211.37) J2.19@6013.39,5239.39 ; 5990.2,5251 ccw(c5990.2,5283.8) J2.19@6013.39,5260.61
  Bottom Layer w10: 5569.81,5271.19 ccw(c5592,5293.38) v1@5592,5262 ; 5572.74,5881.74 cw(c5612,5842.47) R14.1@5612,5898 ; 5577.05,5263.95 cw(c5565.1,5252) v1@5582,5252 ; 5589.81,5898.81 cw(c5612,5876.62) R14.1@5612,5908 R14.1@5612,5905 ; v1@5590.5,5250.5 5558,5283 5558,5867 5600,5909 R14.1@5610,5909
  other v1: 5592,5252
Netkey1_2: key1.2 KEY_SW.1 | length 731.6
  Top Layer w20: key1.2@2491.15,6080.85 ccw(c2452.89,6119.11) 2507,6119.11 ; 2506,6134 2506,6157 v1@2550,6201 ; key1.2@2507,6067 2507,6134 ; 2507,6114.28 ccw(c2554.28,6114.28) key1.2@2520.85,6080.85 ; KEY_SW.1@2716,6528 KEY_SW.1@2730,6528
  Bottom Layer w20: v1@2551,6209 2551,6241.01 2670,6360.01 2670,6456 2728,6514 KEY_SW.1@2728,6525 ; 2677.8,6463.81 ccw(c2615.61,6526) KEY_SW.1@2703.57,6526 ; 2704.36,6490.36 cw(c2729,6465.72) KEY_SW.1@2729,6500.57
  other v1: 2550,6202
Netkey2_2: key2.2 KEY_SW.3 | length 903.7
  Bottom Layer w20: KEY_SW.3@2715.79,6404.27 cw(c2700.42,6378.99) 2730,6378.99 ; 2727.99,5772.01 cw(c2691.98,5736) key2.2@2742.91,5736 ; 2728.22,5771.78 ccw(c2763.91,5807.47) key2.2@2763.91,5757 ; KEY_SW.3@2730,6429 2730,6379 ; KEY_SW.3@2743.61,6405.19 ccw(c2762.01,6378.99) 2730,6378.99 ; key2.2@2762,5738 2659,5841 2659,6308 2730,6379
NetLD1_1: LD1.1 R1.1 | length 712.6
  Top Layer w10: v1@2718.93,4602.93 cw(c2699.44,4583.44) 2727,4583.44 ; LD1.1@2719.93,4563.07 ccw(c2702.86,4580.14) 2727,4580.14 ccw(c2751.14,4580.14) LD1.1@2734.07,4563.07 ; LD1.1@2724,4558 LD1.1@2726,4556 ; v1(2726,4610) 2727,4609 LD1.1@2727,4556 ; 2727,4588.27 cw(c2747.73,4588.27) v1@2733.07,4602.93
  Bottom Layer w10: 2513,4871 ccw(c2483.55,4900.45) R1.1@2525.04,4904.12 ; 2528.15,4886.15 ccw(c2511.38,4902.91) R1.1@2535,4905 2535,4893 2507,4865 2507,4767 2508.13,4767 2626.13,4649 2706,4649 2726,4629 ; 2713.14,4641.86 cw(c2682.09,4610.8) v1(2726,4610) 2726,4629 ; v1@2720.34,4618.24 ccw(c2712.95,4629) 2726,4629 ; 2729.78,4625.22 cw(c2714.77,4610.2) v1@2736,4609.82 ; v1@2731.66,4618.24 cw(c2739.05,4629) 2726,4629
NetLD2_1: LD2.1 R2.1 | length 562.9
  Top Layer w10: v1@2790,4626 2800,4626 2813,4613 LD2.1@2813,4560 ; v1(2791,4624) cw(c2794.95,4608.7) 2806.12,4619.88 ; LD2.1@2805.93,4563.07 ccw(c2788.86,4580.14) 2813,4580.14 ccw(c2837.14,4580.14) LD2.1@2820.07,4563.07
  Bottom Layer w10: R2.1@2528.93,4801.93 cw(c2509.44,4782.44) 2537,4782.44 ; 2537,4787.27 cw(c2557.73,4787.27) R2.1@2543.07,4801.93 ; R2.1@2537,4807 2537,4765 2632.66,4669.34 2749.66,4669.34 v1@2790,4629 ; 2771.1,4647.9 cw(c2747.2,4624) v1@2781,4624 ; 2780.76,4638.24 ccw(c2791,4648.49) v1@2791,4634
NetLD3_1: POWER.1 R13.1 | length 427.2
  Top Layer w10: POWER.1@2978,4822 ccw(c2978,4860.63) 3005.31,4833.31 ; POWER.1@2978,4824 2996,4824 ; POWER.1@2978,4832 ccw(c2978,4894.77) 3022.38,4850.38 ; POWER.1@2985.42,4828.7 ccw(c2996,4838.25) 2996,4824 ; POWER.1@2987.23,4818.15 cw(c2996,4814.5) 2996,4824 ; v1@3016.93,4872.93 cw(c2999.86,4855.86) 3024,4855.86 cw(c3048.14,4855.86) v1@3031.07,4872.93 ; v1(3024,4880) 3024,4852 2996,4824
  Bottom Layer w10: R13.1@2983.93,4986.93 cw(c2966.86,4969.86) 2991,4969.86 cw(c3015.14,4969.86) R13.1@2998.07,4986.93 ; R13.1@2991,4994 2991,4943 3025,4909 v1@3025,4883 ; v1@3016.93,4887.07 ccw(c2997.44,4906.56) 3025,4906.56 ; 3025,4901.73 ccw(c3045.73,4901.73) v1@3031.07,4887.07
NetP1_2: 
NetP1_4: 
NetQ1_1: Q1.1 R17.2 U2.14 | length 852.9
  Top Layer w10: U2.14@3473,5553 3501,5553 v1@3545,5597 ; U2.14@3500.86,5559.81 ccw(c3500.86,5576.6) 3512.73,5564.73 ; U2.14@3507.67,5553 cw(c3523.77,5553) U2.14@3512.38,5564.38 ; 3525.1,5577.1 ccw(c3501.2,5601) v1@3535,5601 ; 3534.76,5586.76 cw(c3545,5576.51) v1@3545,5591 ; v1@3546,5601 v1@3558,5601
  Bottom Layer w10: v1@3537.93,5593.93 cw(c3520.86,5576.86) 3545,5576.86 cw(c3569.14,5576.86) v1@3552.07,5593.93 ; v1@3545,5602 3545,5536 3564,5517 ; 3555.28,5525.72 ccw(c3565.71,5536.15) R17.2@3576.05,5525.63 ; 3562.41,5518.59 ccw(c3572.78,5528.96) R17.2@3583.06,5518.5 ; R17.2@3574.22,5523.16 cw(c3564,5528.55) 3564,5517 ; R17.2@3575.63,5511.82 ccw(c3564,5501.37) 3564,5517 ; R17.2@3575.99,5511.43 cw(c3563.9,5499.34) 3581,5499.34 ; 3581,5490.92 cw(c3608.55,5490.92) R17.2@3589.85,5511.16 ; R17.2@3581,5518 3581,5491 3621,5451 3621,5290 3637,5274 Q1.1@3751,5274 ; R17.2@3583,5517 3564,5517 ; 3716.66,5274 ccw(c3716.66,5307.42) Q1.1@3740.28,5283.79 ; 3720.49,5274 cw(c3720.49,5246.01) Q1.1@3740.28,5265.8
  other v1: 3545,5601
NetQ1_2: Q1.2 R16.1 | length 499
  Bottom Layer w10: R16.1@3576,5311 3576,5301 3638,5239 3776,5239 3801,5264 3801,5301 Q1.2@3751,5351 ; R16.1@3578,5313 ccw(c3611.8,5313) 3587.9,5289.1 ; R16.1@3588,5313 ccw(c3645.94,5313) 3604.97,5272.03 ; Q1.2@3751.24,5336.88 cw(c3751.24,5303.39) 3774.93,5327.07 ; Q1.2@3763.96,5349.6 ccw(c3791.87,5349.6) 3772.13,5329.87
NetQ2_2: Q2.2 R17.1 | length 176.4
  Bottom Layer w10: R17.1@3583,5573 3628,5573 Q2.2@3660,5541 ; R17.1@3590.07,5565.93 cw(c3607.14,5548.86) 3607.14,5573 cw(c3607.14,5597.14) R17.1@3590.07,5580.07 ; 3636.45,5564.55 cw(c3613.3,5541.4) Q2.2@3646.04,5541.4 ; 3638.49,5562.51 ccw(c3658.76,5582.78) Q2.2@3658.76,5554.12
NetQ2_3: Q2.3 R18.2 | length 219.2
  Bottom Layer w10: R18.2@3666.5,5658.94 cw(c3666.5,5635.85) 3682.83,5652.17 ; R18.2@3667,5671 R18.2@3667,5668 ; R18.2@3674,5668 R18.2@3667,5668 ; R18.2@3676.5,5668.94 ccw(c3701.69,5668.94) 3683.88,5651.12 ; 3726.09,5608.91 cw(c3695.98,5578.8) Q2.3@3738.56,5578.8 ; 3737.97,5597.03 ccw(c3751.28,5610.34) Q2.3@3751.28,5591.52 ; Q2.3@3754,5581 R18.2@3667,5668
NetR16_2: R16.2 U2.13 | length 463.6
  Top Layer w10: U2.13@3468,5503 3537,5503 v1@3562,5478 ; U2.13@3505.67,5498.18 cw(c3517.3,5486.56) 3517.3,5503 cw(c3517.3,5519.44) U2.13@3505.67,5507.82 ; 3537.15,5502.85 cw(c3501.3,5467) v1@3552,5467 ; 3554.22,5485.78 cw(c3535.44,5467) v1(3562,5467)
  Bottom Layer w10: v1@3554.93,5459.93 cw(c3537.86,5442.86) 3562,5442.86 cw(c3586.14,5442.86) v1@3569.07,5459.93 ; 3562,5381.83 ccw(c3592.27,5381.83) R16.2@3570.86,5360.43 ; 3562,5405.97 ccw(c3616.41,5405.97) R16.2@3577.94,5367.5 ; 3562,5430.11 ccw(c3640.55,5430.11) R16.2@3585.01,5374.57 ; v1(3562,5467) 3562,5383 R16.2@3578,5367
NetR19_2: R19.2 R22.2 U3.6 | length 1110.5
  Top Layer w10: v1@4689.37,5246.37 U3.6@4755.89,5246.37 ; v1@4693.07,5239.93 cw(c4708.62,5224.38) 4708.62,5246.37 ; v1@4693.07,5254.07 ccw(c4711.66,5272.66) 4711.66,5246.37
  Bottom Layer w10: v1@4692,5248 4693,5247 4808,5247 ; v1@4693.07,5239.93 cw(c4710.14,5222.86) 4710.14,5247 cw(c4710.14,5271.14) v1@4693.07,5254.07 ; 4809,5247 5140,5247 5369,5018 ; R19.2@5359.98,4996.68 ccw(c5339.31,5018) 5369,5018 ; R19.2@5367,4989 5369,4991 R22.2@5421,4991 ; R19.2@5369,4989 5369,5018 ; 5369,5008.66 ccw(c5386.1,5008.66) 5374.01,4996.57 ccw(c5387.46,5010.02) 5387.46,4991 ; R19.2@5374.01,4982.43 cw(c5394.7,4961.74) 5394.7,4991 ; 5396.59,4991 ccw(c5396.59,5016.85) R22.2@5414.86,4998.57 ; 5399,4991 cw(c5399,4968.56) R22.2@5414.86,4984.43
  other v1: 4686,5247
NRST: C28.2 D1.1 J2.15 R24.1 reset.1 U3.25 | length 4672.2
  Top Layer w10: v1@4494,5789 4535.86,5789 4703.86,5621 U3.25@4756,5621 ; v1@4502.07,5779.93 cw(c4523.97,5758.03) 4523.97,5789 ; v1@4502.07,5794.07 ccw(c4514.31,5806.31) 4514.31,5789 ; U3.25@4758,5621 4811,5621 4825,5635 v1@4839,5635 ; 4816.9,5626.9 cw(c4828.4,5615.4) v1(4833,5631) ; v1@5533.07,5451.93 cw(c5550.14,5434.86) 5550.14,5459 cw(c5550.14,5483.14) v1@5533.07,5466.07 ; v1@5534,5459 J2.15@6013,5459 ; 5941.92,5459 cw(c5941.92,5367.92) J2.15@6006.32,5432.32 ; 5966.06,5459 cw(c5966.06,5392.06) J2.15@6013.39,5439.39 ; 5985.37,5459 ccw(c5985.37,5488.63) J2.15@6006.32,5467.68 ; 5990.2,5459 cw(c5990.2,5416.2) J2.15@6020.46,5446.46
  Bottom Layer w10: reset.1@2756.91,5592 cw(c2756.91,5509.69) 2815.11,5567.89 ; reset.1@2756.91,5602 cw(c2756.91,5543.83) 2798.04,5584.96 ; reset.1@2757,5614 2769,5614 2870,5513 C28.2@2913,5513 ; reset.1@2782.91,5618 ccw(c2826.13,5618) 2795.57,5587.43 ; 2807,5575 2808,5575 ; 2881.27,5513 ccw(c2881.27,5547.17) 2905.43,5523.01 ccw(c2889.57,5538.87) 2912,5538.87 ; 2895.45,5513 cw(c2895.45,5498.88) C28.2@2905.43,5508.86 ; C28.2@2912,5514 2912,5594 2937,5619 R24.1@3008,5619 ; 2912,5541.29 ccw(c2937.85,5541.29) C28.2@2919.57,5523.01 ; R24.1@2999.93,5626.07 cw(c2982.86,5643.14) 2982.86,5619 cw(c2982.86,5594.86) 2999.93,5611.93 cw(c2980.44,5592.44) 3008,5592.44 ; 3008,5597.27 cw(c3028.73,5597.27) R24.1@3014.07,5611.93 ; R24.1@3008,5621 3008,5592 3024,5576 3099,5576 3141,5618 3141,5770 D1.1@3184.5,5813.5 ; D1.1@3155.24,5811.85 cw(c3109.73,5804.03) 3142.38,5771.38 cw(c3179.52,5734.25) D1.1@3183.14,5786.64 ; 3156.04,5785.04 ccw(c3133.05,5808.04) D1.1@3165.1,5813.54 ; 3157.92,5786.92 cw(c3181.52,5763.31) D1.1@3183.83,5796.62 ; D1.1@3175,5816 D1.1@3183,5816 ; D1.1@3181,5817 3181,5849 3199.03,5867.03 4402,5867.03 4402,5866 4480,5788 v1@4494,5788 ; 4454.03,5813.97 ccw(c4495,5854.94) v1@4495,5797 ; 4471.1,5796.9 ccw(c4495,5820.8) v1(4495,5787) ; v1(4833,5631) cw(c4837.9,5616.62) 4848.64,5627.36 ; v1@4842,5634 4854,5622 4854,5621 5370,5621 v1@5528.5,5462.5 ; 5504.69,5486.31 cw(c5477.37,5459) v1@5516,5459
  other v1: 5526,5459
PA0: P4.47 U3.34 | length 892
  Top Layer w10: U3.34@4756,5798 4803,5798 4836,5831 4836,6061.58 5128.42,6354 5178,6354 P4.47@5252,6428
PA1: P4.46 U3.35 | length 1164
  Top Layer w10: U3.35@4755.89,5817.23 4793.23,5817.23 4812,5836 4812,6064.45 5120.55,6373 5168,6373 5200,6405 5200,6478 P4.46@5150,6528 ; P4.46@5150,6510 P4.46@5150,6527 ; P4.46@5150.9,6506.59 cw(c5152.88,6462) 5184.44,6493.56 ; P4.46@5151.35,6496.6 cw(c5154.24,6431.25) 5200.5,6477.5 cw(c5248.95,6525.96) P4.46@5180.43,6526.68 ; P4.46@5170.43,6526.78 ccw(c5215.66,6526.31) 5183.68,6494.32
PA2: P4.45 U3.36 | length 952.8
  Top Layer w10: 4703.13,5891.87 cw(c4648.17,5836.92) U3.36@4725.89,5836.92 ; 4720.2,5874.8 cw(c4682.32,5836.92) U3.36@4735.89,5836.92 ; 4737.27,5857.73 cw(c4716.46,5836.92) U3.36@4745.89,5836.92 ; U3.36@4754.34,5840.66 cw(c4750.6,5836.92) U3.36@4755.89,5836.92 4755.89,5839.11 4696,5899 4696,5975.32 P4.45@5150,6429.32 ; P4.45@5144.81,6424 P4.45@5150,6424 ; P4.45@5149,6417 P4.45@5149,6429
PA3: P4.44 U3.37 | length 934.2
  Top Layer w10: U3.37@4672.28,5921.28 4672.28,5978.47 5100,6406.19 5100,6465 5050,6515 P4.44@5050,6527 ; P4.44@5050,6496.57 cw(c5050,6452.07) 5081.47,6483.53 ; P4.44@5069.94,6522.52 ccw(c5110.67,6513.37) 5081.15,6483.85 ; P4.44@5079.69,6520.33 ccw(c5131.66,6508.66) 5094,6471
PA4: P4.43 U3.40 | length 704.6
  Top Layer w10: U3.40@4613,5952.73 4613,6038 4933,6358 4983,6358 P4.43@5050,6425 ; P4.43@5026,6424 P4.43@5048,6424
PA5: P4.42 U3.41 | length 966.5
  Top Layer w10: U3.41@4594,5923 4594,6046.32 4924.68,6377 4970.94,6377 5000,6406.06 5000,6449 4950,6499 P4.42@4950,6527 ; P4.42@4959.39,6522.46 ccw(c4990.58,6507.4) 4966.09,6482.91 ; P4.42@4968.4,6518.11 ccw(c5004,6500.92) 4976.04,6472.96 ; P4.42@4977.4,6513.76 ccw(c5017.43,6494.43) 4986,6463
PA6: P4.41 U3.42 | length 663.2
  Top Layer w10: U3.42@4574,5920 4574,6053.19 4945.81,6425 P4.41@4950,6425
PA7: P4.40 U3.43 | length 902
  Top Layer w10: 4553,5956.36 4553,6059.19 4900,6406.19 4900,6471 4850,6521 P4.40@4850,6527 ; P4.40@4850,6496.57 cw(c4850,6437.58) 4891.71,6479.29 ; P4.40@4850,6506.57 cw(c4850,6471.72) 4874.64,6496.36 ; P4.40@4870.27,6524.42 ccw(c4913.13,6518.97) 4882.58,6488.42 ; P4.40@4880.19,6523.16 ccw(c4938.71,6515.72) 4897,6474
PA8: P3.9 U3.100 | length 1289.7
  Top Layer w10: P3.9@3335,4487 3387,4539 ; P3.9@3337,4506.43 ccw(c3337,4548.52) 3366.76,4518.76 ; P3.9@3337,4516.43 ccw(c3337,4582.66) 3383.83,4535.83 ; P3.9@3357.4,4487.13 cw(c3404.61,4489.74) 3371.18,4523.18 ; P3.9@3367.39,4487.68 cw(c3434.59,4491.4) 3387,4539 ; U3.100@3902,5306 3809,5306 3740,5237 3740,5022 3387,4669 3387,4539